# Altium PCB LP_LED_CUBE_8x8x8.PcbDoc (part 2 of 2)
Units mil, origin at the board's own origin, x right, y up, seen from the top; angles counter-clockwise.
Board outline 4240 x 2580 mil, 2 copper layers (Top Layer, Bottom Layer), stack 42.17 mil thick; 171 components, 249 nets, 833 pads, 0 vias.
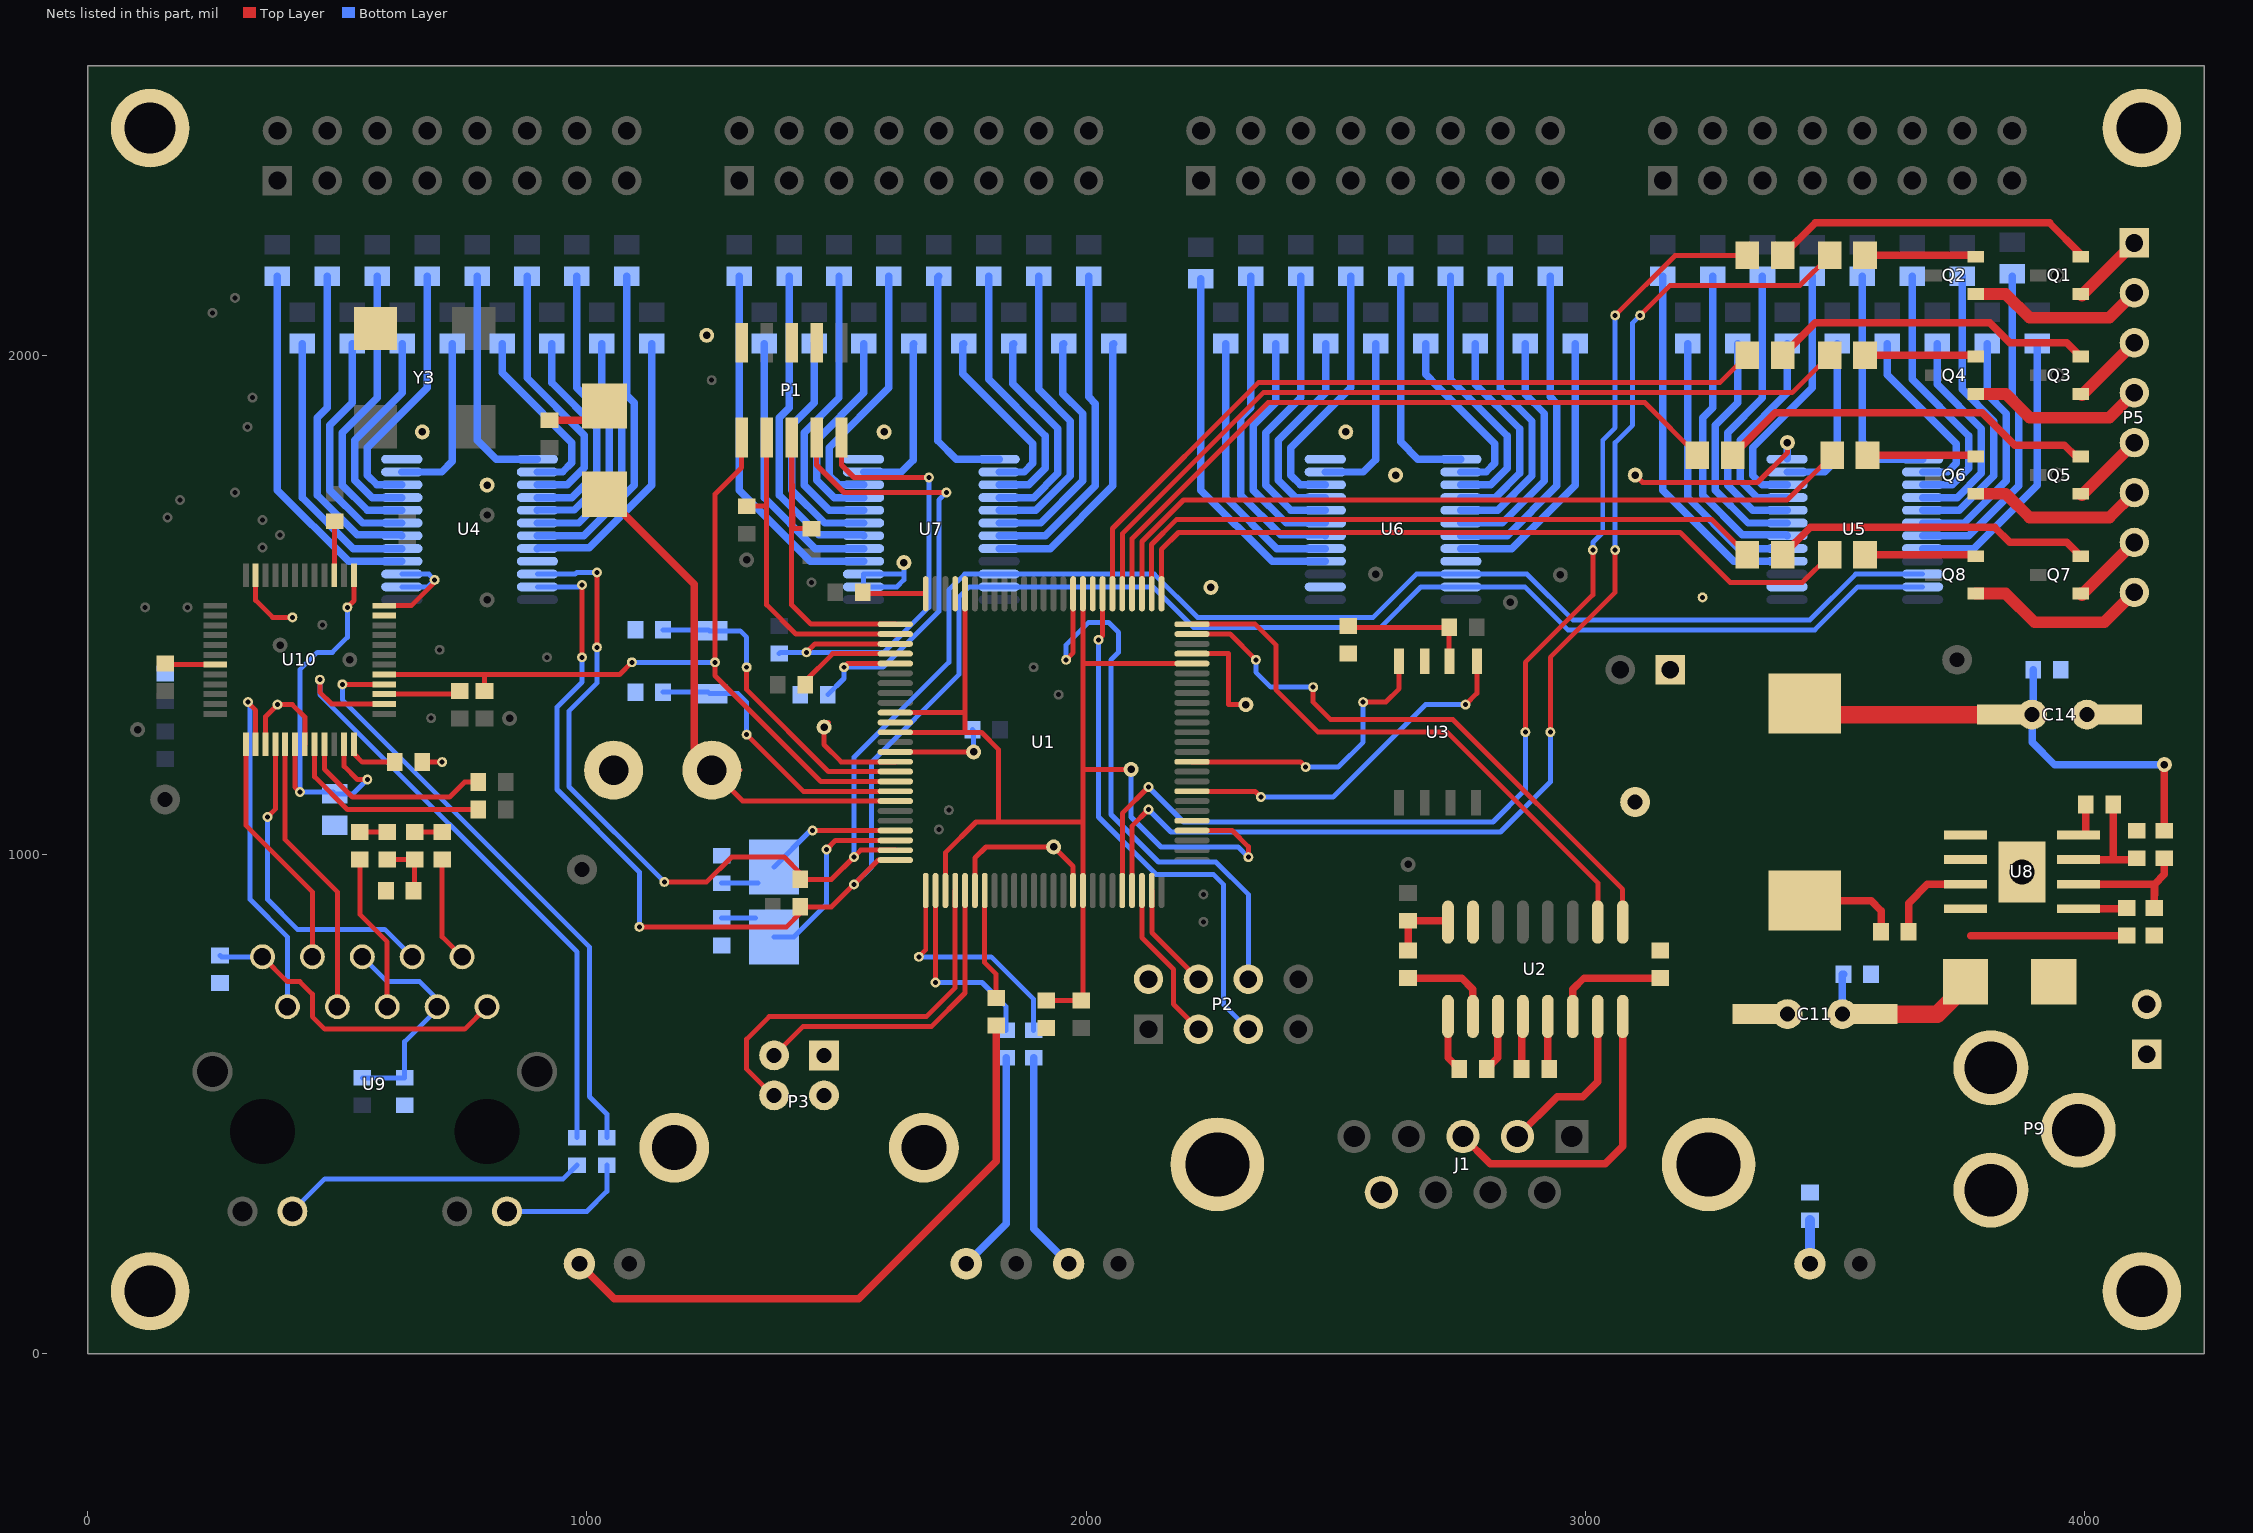
[diagram p2: the nets of this part, all layers, seen from the top]

## Nets (pads, with @x,y where several pads share a name; then routed paths per layer and width w, separated by ;. In a path a pad name is that pad's centre, name@x,y a point inside that pad or via, vN(x,y) a via of type N, cw(c..) or ccw(c..) an arc to the next point about the centre after c; other vN are vias at no path point) (continued)
F-SO: pad.42 pad.43 U1.61 U3.8 | length 581.2
  Top Layer w10: U1.61@2212.24,1185.63 2429.37,1185.63 pad.42@2440,1175 ; pad.43@2559.49,1305.51 2600.51,1305.51 2627.24,1332.24 U3.8@2627.24,1386.73
  Bottom Layer w10: pad.42@2440,1175 2505,1175 2555,1225 pad.43@2555,1305
F-W\P\: pad.44 pad.45 U1.58 U3.5 | length 725.3
  Top Layer w10: U1.58@2212.24,1126.57 2338.43,1126.57 pad.45@2350,1115 ; pad.44@2760,1300 2782.76,1322.76 U3.5@2782.76,1386.73
  Bottom Layer w10: pad.45@2350,1115 2495,1115 2680,1300 pad.44@2760,1300
GND: BT1.2 C4.1 C5.1 C6.1 C7.1 C8.1 C9.1 C10.1 C11.2 C12.2 C14.2 C15.2 C16.2 C18.2 C19.2 C20.2 C22.1 C23.2 J1.9 J1.10 J1.11 P1.3 P1.5 P1.9 P2.5 P3.4 P3.5 P9.2 P9.3 pad. pad.0 pad.1 pad.16 pad.27 pad.36 pad.49 pad.50 pad.51 pad.52 pad.53 pad.56 pad.65 pad.68 pad.70 pad.77 pad.95 pad.107 R7.2 R89.1 R91.1 R102.2 U1.11 U1.15 U1.31 U1.41 U1.55 U1.72 U1.83 U1.97 U2.15 U3.7 U4.2 U4.3 U4.12 U4.21 U5.2 U5.12 U6.2 U6.12 U6.21 U7.2 U7.3 U7.12 U8.5 U10.15 U10.19 U10.35 U10.36 U10.47 Y3.2 | length 2021.8
  Top Layer w10: U10.47@336.42,1559.29 336.42,1509.15 370.56,1475 pad.51@410,1475 ; U10.15@356.1,1220.71 356.1,1276.1 pad.68@380,1300 410,1300 434.84,1275.16 U10.19@434.84,1220.71 ; U10.36@594.29,1498.27 648.27,1498.27 695,1545 pad.107@695,1550 ; R102.2@670,1185 pad.70@710,1185 ; pad.49@1484.37,1264.37 pad.49@1475,1255 1475,1220 1509.37,1185.63 U1.15@1617.76,1185.63 ; U1.31@1777.2,927.76 1777.2,992.8 1799.41,1015 pad.56@1935,1015 1974.06,975.94 U1.41@1974.06,927.76 ; U1.72@2212.24,1402.17 2285,1402.17 2285,1300 pad.65@2320,1300 ; pad.77@3100,1760 3115,1745 3345,1745 3405,1805 pad.1@3405,1825
  Bottom Layer w10: U4.2@629.17,1536.02 681.02,1536.02 pad.107@695,1550 683.39,1561.61 U4.3@629.17,1561.61 ; pad.36@1635,1584.5 1635,1561.61 ; U5.12@3404.17,1791.73 U5.12@3405,1792.56 ; 1635,1561.61 U7.3@1554.17,1561.61 U7.2@1554.17,1536.02 1621.02,1536.02 1635,1550 1635,1561.61
  Bottom Layer w15: U5.12@3405,1792.56 pad.1@3405,1825
LED1: pad.55 R12.1 U1.27 | length 393.3
  Top Layer w10: pad.55@1698.46,743.46 U1.27@1698.46,927.76
  Bottom Layer w10: pad.55@1698.46,743.46 1791.54,743.46 1840,695 R12.1@1840,647.56
LED2: pad.54 R13.1 U1.26 | length 466.1
  Top Layer w10: pad.54@1665,795 1678.78,808.78 U1.26@1678.78,927.76
  Bottom Layer w10: pad.54@1665,795 1810,795 1895,710 R13.1@1895,647.56
LED_ACT: pad.48 R94.2 U10.26 | length 1294.8
  Top Layer w10: pad.48@465,1350 465,1325 488.58,1301.42 U10.26@594.29,1301.42
  Bottom Layer w10: pad.48@465,1350 465,1320 980,805 R94.2@980,432.56
LED_LINK: pad.46 R95.2 U10.28 | length 1212.1
  Top Layer w10: pad.46@510,1340.79 U10.28@594.29,1340.79
  Bottom Layer w10: pad.46@510,1340.79 510,1310 1005,815 1005,515 1040,480 R95.2@1040,432.56
"M232 +V": C2.1 U2.2 | length 193.8
  Top Layer w15: C2.1@2645,752.44 2752.56,752.44 2775,730 U2.2@2775,675.51
"M232 RX2": J1.3 U2.8 | length 617.8
  Top Layer w15: J1.3@2755,434.92 2809.92,380 3040,380 3075,415 U2.8@3075,675.51
"M232 TX2": J1.2 U2.7 | length 337.1
  Top Layer w15: J1.2@2864.06,434.92 2944.13,515 2995,515 3025,545 U2.7@3025,675.51
NetBT1_1: BT1.1 D4.2 U1.19 | length 1079.6
  Top Layer w10: BT1.1@1225.32,1194.69 BT1.1@1250.32,1194.69 ; BT1.1@1306.3,1168.7 BT1.1@1250.32,1168.7 1312.13,1106.89 U1.19@1617.76,1106.89
  Top Layer w15: D4.2@1035,1721.42 1215,1541.42 1215,1205 BT1.1@1225.32,1194.69
NetC1_1: C1.1 U2.3 | length 114.8
  Top Layer w15: C1.1@2802.56,570 2825,592.44 U2.3@2825,675.51
NetC1_2: C1.2 U2.1 | length 114.8
  Top Layer w15: U2.1@2725,675.51 2725,592.44 C1.2@2747.44,570
NetC2_2: C2.2 L1.1 U2.16 | length 141.1
  Top Layer w15: C2.2@2645,807.56 L1.1@2645,867.44 2722.05,867.44 U2.16@2725,864.49
NetC3_1: C3.1 U2.5 | length 106.6
  Top Layer w15: U2.5@2925,675.51 2925,572.56 C3.1@2927.56,570
NetC3_2: C3.2 U2.4 | length 106.6
  Top Layer w15: C3.2@2872.44,570 2872.44,672.95 U2.4@2875,675.51
NetC4_2: C4.2 U2.6 | length 238.8
  Top Layer w15: U2.6@2975,675.51 2975,730 2997.44,752.44 C4.2@3150,752.44
NetC5_2: C5.2 pad.20 U1.16 Y1.1 | length 644.4
  Top Layer w10: pad.20@1320,1375 1320,1330 1484.06,1165.94 U1.16@1617.76,1165.94
  Bottom Layer w10: C5.2@1152.56,1450 1243.78,1450 Y1.1@1245.79,1447.99 1307.01,1447.99 1320,1435 pad.20@1320,1375
NetC6_2: C6.2 pad.19 U1.18 Y1.2 | length 585.5
  Top Layer w10: pad.19@1320,1240 1433.43,1126.57 U1.18@1617.76,1126.57
  Bottom Layer w10: C6.2@1152.56,1325 1242.8,1325 Y1.2@1245.79,1322.01 1302.99,1322.01 1320,1305 pad.19@1320,1240
NetC7_2: C7.2 pad.17 U1.22 Y2.1 | length 345.4
  Top Layer w10: pad.17@1452.17,1047.83 U1.22@1617.76,1047.83
  Bottom Layer w10: C7.2@1270,942.44 Y2.1@1342.44,942.44 ; Y2.1@1375,975 1447.83,1047.83 pad.17@1452.17,1047.83
NetC8_2: C8.2 pad.18 U1.23 Y2.2 | length 454.6
  Top Layer w10: pad.18@1480,1010 1498.15,1028.15 U1.23@1617.76,1028.15
  Bottom Layer w10: C8.2@1270,872.56 Y2.2@1337.44,872.56 ; Y2.2@1375,835 1415,835 1480,900 pad.18@1480,1010
NetC9_2: C9.2 L2.1 pad.85 pad.86 U1.10 U1.12 U1.28 U1.42 U1.54 U1.71 U1.84 U1.96 | length 3091.5
  Top Layer w10: U1.12@1617.76,1244.69 1757.52,1244.69 ; U1.10@1617.76,1284.06 1756.57,1284.06 ; U1.28@1718.15,927.76 1718.15,1003.7 1779.45,1065 1825,1065 ; U1.96@1757.52,1522.24 1757.52,1244.69 ; C9.2@1920,707.56 L2.1@1990,707.56 1993.74,707.56 U1.42@1993.74,927.76 1993.74,1065 ; U1.84@1993.74,1522.24 1993.74,1383.74 U1.71@2212.24,1382.48 1993.74,1382.48 1993.74,1170 ; pad.86@2090,1170.49 1994.23,1170.49 1993.74,1170 ; U1.54@2212.24,1047.83 2292.61,1047.83 2325,1015.45 pad.85@2325,994.51 ; 1757.52,1244.69 1790.32,1244.69 1825,1210 1825,1065 ; 1825,1065 1993.74,1065 ; 1993.74,1065 1993.74,1170
  Bottom Layer w10: pad.86@2090,1170.49 2090,1075 2150,1015 2304.51,1015 pad.85@2325,994.51
NetC10_2: C10.2 L3.1 U3.6 | length 271.9
  Top Layer w10: C10.2@2525,1457.56 2527.56,1455 L3.1@2727.44,1455 2727.44,1386.93 U3.6@2727.64,1386.73
NetC13_1: C13.1 U8.7 | length 200.5
  Top Layer w15: C13.1@3647.56,845 3647.56,902.56 3685,940 3761.81,940 U8.7@3775,940
NetC13_2: C13.2 L4.1 U8.6 | length 203.3
  Top Layer w15: L4.1@3440,907.5 3572.5,907.5 3592.44,887.56 C13.2@3592.44,845
NetC16_1: C16.1 R90.2 U8.3 | length 235.9
  Top Layer w10: C16.1@4105,992.44 C16.1@4115,992.44
  Top Layer w15: U8.3@3988.19,989.61 4102.17,989.61 C16.1@4105,992.44 ; 4057.56,992.05 R90.2@4057.56,1100
NetC17_1: C17.1 U9.8 | length 211.6
  Top Layer w10: C17.1@710,990 710,835 U9.8@750,795
NetC17_2: C17.2 R92.1 | length 55
  Top Layer w10: R92.1@655,1045.12 C17.2@710,1045.12
NetC18_1: C18.1 L5.1 U9.4 U9.7 | length 454.6
  Bottom Layer w10: L5.1@550,552.56 C18.1@635,552.56 635,625 700,690 U9.7@700,695 700,710 665,745 600,745 U9.4@550,795
NetC19_1: C19.1 R92.2 R93.1 | length 118.5
  Top Layer w10: R93.1@600,990 R92.2@655,990 655,930 C19.1@652.56,927.56
NetC21_1: C21.1 U9.5 | length 317.8
  Top Layer w10: C21.1@545,990 545,880 600,825 U9.5@600,695
NetC21_2: C21.2 R93.2 | length 55
  Top Layer w10: C21.2@545,1045.12 R93.2@600,1045.12
NetC22_2: C22.2 U9.9 U9.10 | length 641.1
  Top Layer w10: U9.9@350,795 400,745 425,745 450,720 450,675 475,650 755,650 U9.10@800,695
  Bottom Layer w10: C22.2@265,797.56 267.56,795 U9.9@350,795
NetD1_2: D1.2 R11.2 | length 1250.3
  Top Layer w15: D1.2@985,180 1055,110 1545,110 1820,385 R11.2@1820,657.44
NetD2_2: D2.2 R12.2 | length 445.6
  Bottom Layer w15: D2.2@1760,180 1840,260 R12.2@1840,592.44
NetD3_2: D3.2 R13.2 | length 441.4
  Bottom Layer w15: R13.2@1895,592.44 1895,250 D3.2@1965,180
NetD4_1: D4.1 R14.1 | length 121.8
  Top Layer w10: D4.1@1006.42,1870 D4.1@1035,1898.58
  Top Layer w15: R14.1@925,1870 D4.1@1006.42,1870
NetD5_1: D5.1 W1.2
NetD6_2: D6.2 R91.2 | length 87.4
  Bottom Layer w20: D6.2@3450,180 R91.2@3450,267.44
NetP9_1: P9.1 W1.1
NetQ1_2: Q1.2 R15.1 | length 654.9
  Top Layer w10: Q1.2@3992.32,2197.4 Q1.2@3992.32,2202.68
  Top Layer w15: R15.1@3395.43,2200 3460.43,2265 3930,2265 Q1.2@3992.32,2202.68
NetQ2_2: Q2.2 R23.1 | length 223
  Top Layer w10: Q2.2@3779.72,2200 Q2.2@3782.32,2197.4
  Top Layer w15: R23.1@3560.43,2200 Q2.2@3779.72,2200
NetQ3_2: Q3.2 R33.1 | length 651.8
  Top Layer w15: R33.1@3395.43,2000 3460.43,2065 3810,2065 3850,2025 3964.72,2025 Q3.2@3992.32,1997.4
NetQ4_2: Q4.2 R34.1 | length 223
  Top Layer w10: Q4.2@3779.72,2000 Q4.2@3782.32,1997.4
  Top Layer w15: R34.1@3560.43,2000 Q4.2@3779.72,2000
NetQ5_2: Q5.2 R35.1 | length 768.4
  Top Layer w15: R35.1@3295.43,1800 3380.43,1885 3795,1885 3860,1820 3960,1820 3982.6,1797.4 Q5.2@3992.32,1797.4
NetQ6_2: Q6.2 R36.1 | length 218
  Top Layer w10: Q6.2@3779.72,1800 Q6.2@3782.32,1797.4
  Top Layer w15: R36.1@3565.43,1800 Q6.2@3779.72,1800
NetQ7_2: Q7.2 R37.1 | length 643.5
  Top Layer w15: R37.1@3395.43,1600 3450.43,1655 3820,1655 3850,1625 3964.72,1625 Q7.2@3992.32,1597.4
NetQ8_2: Q8.2 R41.1 | length 223
  Top Layer w10: Q8.2@3779.72,1600 Q8.2@3782.32,1597.4
  Top Layer w15: R41.1@3560.43,1600 Q8.2@3779.72,1600
NetR16_2: R16.2 U4.4 | length 736.8
  Bottom Layer w15: R16.2@380,2158.5 380,1730 522.8,1587.2 U4.4@629.17,1587.2
NetR17_2: R17.2 U4.5 | length 550
  Bottom Layer w15: R17.2@430,2023.5 430,1715 532.2,1612.8 U4.5@629.17,1612.8
NetR18_1: R18.1 U4.20 | length 565.4
  Bottom Layer w15: U4.20@900.83,1612.8 902.56,1614.53 1004.53,1614.53 1130,1740 R18.1@1130,2023.5
NetR19_2: R19.2 U4.6 | length 649.8
  Bottom Layer w15: R19.2@480,2158.5 480,1895 460,1875 460,1720 539.88,1640.12 627.44,1640.12 U4.6@629.17,1638.39
NetR20_1: R20.1 U4.19 | length 661
  Bottom Layer w15: U4.19@900.83,1638.39 993.39,1638.39 1095,1740 1095,1905 1080,1920 R20.1@1080,2158.5
NetR21_2: R21.2 U4.7 | length 483.7
  Bottom Layer w15: R21.2@530,2023.5 530,1905 485,1860 485,1730 551.02,1663.98 U4.7@629.17,1663.98
NetR22_1: R22.1 U4.18 | length 494.9
  Bottom Layer w15: U4.18@900.83,1663.98 983.98,1663.98 1070,1750 1070,1885 1030,1925 R22.1@1030,2023.5
NetR24_2: R24.2 U4.8 | length 587.6
  Bottom Layer w15: R24.2@580,2158.5 580,1915 510,1845 510,1740 560.43,1689.57 U4.8@629.17,1689.57
NetR25_1: R25.1 U4.17 | length 599
  Bottom Layer w15: U4.17@900.83,1689.57 900.83,1690 975,1690 1045,1760 1045,1870 980,1935 R25.1@980,2158.5
NetR26_2: R26.2 U4.9 | length 421.5
  Bottom Layer w15: U4.9@629.17,1714.96 570.04,1714.96 535,1750 535,1830 630,1925 R26.2@630,2023.5
NetR27_1: R27.1 U4.16 | length 435.7
  Bottom Layer w15: U4.16@900.83,1714.96 969.96,1714.96 1020,1765 1020,1855 930,1945 R27.1@930,2023.5
NetR28_2: R28.2 U4.10 | length 525.4
  Bottom Layer w15: U4.10@629.17,1740.55 579.45,1740.55 560,1760 560,1815 680,1935 R28.2@680,2158.5
NetR29_1: R29.1 U4.15 | length 539.6
  Bottom Layer w15: R29.1@880,2158.5 880,1955 995,1840 995,1775 960.55,1740.55 U4.15@900.83,1740.55
NetR30_2: R30.2 U4.11 | length 345.8
  Bottom Layer w15: U4.11@629.17,1766.14 708.86,1766.14 730,1787.28 R30.2@730,2023.5
NetR31_1: R31.1 U4.14 | length 373.5
  Bottom Layer w15: R31.1@830,2023.5 830,1965 855,1940 855,1939.64 970,1824.64 970,1785 951.14,1766.14 U4.14@900.83,1766.14
NetR32_1: R32.1 U4.13 | length 465.2
  Bottom Layer w15: R32.1@780,2158.5 780,1830 818.27,1791.73 U4.13@900.83,1791.73
NetR38_2: R38.2 U5.4 | length 736.8
  Bottom Layer w15: R38.2@3155,2158.5 3155,1730 3297.8,1587.2 U5.4@3404.17,1587.2
NetR39_2: R39.2 U5.5 | length 550
  Bottom Layer w15: R39.2@3205,2023.5 3205,1715 3307.2,1612.8 U5.5@3404.17,1612.8
NetR40_1: R40.1 U5.20 | length 565.4
  Bottom Layer w15: U5.20@3675.83,1612.8 3777.8,1612.8 3905,1740 R40.1@3905,2023.5
NetR42_2: R42.2 U5.6 | length 649.8
  Bottom Layer w15: R42.2@3255,2158.5 3255,1895 3235,1875 3235,1720 3314.88,1640.12 3402.44,1640.12 U5.6@3404.17,1638.39
NetR43_1: R43.1 U5.19 | length 659.5
  Bottom Layer w15: U5.19@3675.83,1638.39 3768.39,1638.39 3868.27,1738.27 3868.27,1903.27 3855,1916.54 R43.1@3855,2158.5
NetR44_2: R44.2 U5.7 | length 483.7
  Bottom Layer w15: R44.2@3305,2023.5 3305,1905 3260,1860 3260,1730 3326.02,1663.98 U5.7@3404.17,1663.98
NetR45_1: R45.1 U5.18 | length 493.4
  Bottom Layer w15: U5.18@3675.83,1663.98 3758.98,1663.98 3843.27,1748.27 3843.27,1883.27 3805,1921.54 R45.1@3805,2023.5
NetR46_2: R46.2 U6.4 | length 731.8
  Bottom Layer w15: R46.2@2230,2153.5 2230,1730 2372.8,1587.2 U6.4@2479.17,1587.2
NetR47_2: R47.2 U5.8 | length 587.6
  Bottom Layer w15: R47.2@3355,2158.5 3355,1915 3285,1845 3285,1740 3335.43,1689.57 U5.8@3404.17,1689.57
NetR48_1: R48.1 U5.17 | length 597.3
  Bottom Layer w15: U5.17@3675.83,1689.57 3749.57,1689.57 3818.27,1758.27 3818.27,1868.27 3755,1931.54 R48.1@3755,2158.5
NetR49_2: R49.2 U6.5 | length 550
  Bottom Layer w15: R49.2@2280,2023.5 2280,1715 2382.2,1612.8 U6.5@2479.17,1612.8
NetR50_1: R50.1 U6.20 | length 565.4
  Bottom Layer w15: U6.20@2750.83,1612.8 2852.8,1612.8 2980,1740 R50.1@2980,2023.5
NetR51_2: R51.2 U5.9 | length 421.5
  Bottom Layer w15: U5.9@3404.17,1714.96 3345.04,1714.96 3310,1750 3310,1830 3405,1925 R51.2@3405,2023.5
NetR52_1: R52.1 U5.16 | length 434.2
  Bottom Layer w15: U5.16@3675.83,1714.96 3744.96,1714.96 3793.27,1763.27 3793.27,1853.27 3705,1941.54 R52.1@3705,2023.5
NetR53_2: R53.2 U6.6 | length 649.8
  Bottom Layer w15: R53.2@2330,2158.5 2330,1895 2310,1875 2310,1720 2389.88,1640.12 2477.44,1640.12 U6.6@2479.17,1638.39
NetR54_1: R54.1 U6.19 | length 659.5
  Bottom Layer w15: U6.19@2750.83,1638.39 2843.39,1638.39 2943.27,1738.27 2943.27,1903.27 2930,1916.54 R54.1@2930,2158.5
NetR55_2: R55.2 U5.10 | length 525.4
  Bottom Layer w15: U5.10@3404.17,1740.55 3354.45,1740.55 3335,1760 3335,1815 3455,1935 R55.2@3455,2158.5
NetR56_1: R56.1 U5.15 | length 538.1
  Bottom Layer w15: R56.1@3655,2158.5 3655,1951.54 3768.27,1838.27 3768.27,1773.27 3735.55,1740.55 U5.15@3675.83,1740.55
NetR57_2: R57.2 U6.7 | length 483.7
  Bottom Layer w15: R57.2@2380,2023.5 2380,1905 2335,1860 2335,1730 2401.02,1663.98 U6.7@2479.17,1663.98
NetR58_1: R58.1 U6.18 | length 493.4
  Bottom Layer w15: U6.18@2750.83,1663.98 2833.98,1663.98 2918.27,1748.27 2918.27,1883.27 2880,1921.54 R58.1@2880,2023.5
NetR59_2: R59.2 U5.11 | length 343.5
  Bottom Layer w15: U5.11@3404.17,1766.14 3480,1766.14 3505,1791.14 R59.2@3505,2023.5
NetR60_1: R60.1 U5.14 | length 372.2
  Bottom Layer w15: R60.1@3605,2023.5 3605,1961.54 3604.82,1961.36 3743.27,1822.91 3743.27,1783.27 3726.14,1766.14 U5.14@3675.83,1766.14
NetR61_2: R61.2 U6.8 | length 587.6
  Bottom Layer w15: R61.2@2430,2158.5 2430,1915 2360,1845 2360,1740 2410.43,1689.57 U6.8@2479.17,1689.57
NetR62_1: R62.1 U6.17 | length 597.3
  Bottom Layer w15: U6.17@2750.83,1689.57 2824.57,1689.57 2893.27,1758.27 2893.27,1868.27 2830,1931.54 R62.1@2830,2158.5
NetR63_1: R63.1 U5.13 | length 467.2
  Bottom Layer w15: R63.1@3555,2158.5 3555,1826.54 3589.8,1791.73 U5.13@3675.83,1791.73
NetR64_2: R64.2 U7.4 | length 736.8
  Bottom Layer w15: R64.2@1305,2158.5 1305,1730 1447.8,1587.2 U7.4@1554.17,1587.2
NetR65_2: R65.2 U6.9 | length 421.5
  Bottom Layer w15: U6.9@2479.17,1714.96 2420.04,1714.96 2385,1750 2385,1830 2480,1925 R65.2@2480,2023.5
NetR66_1: R66.1 U6.16 | length 434.2
  Bottom Layer w15: U6.16@2750.83,1714.96 2819.96,1714.96 2868.27,1763.27 2868.27,1853.27 2780,1941.54 R66.1@2780,2023.5
NetR67_2: R67.2 U7.5 | length 550
  Bottom Layer w15: R67.2@1355,2023.5 1355,1715 1457.2,1612.8 U7.5@1554.17,1612.8
NetR68_1: R68.1 U7.20 | length 565.4
  Bottom Layer w15: U7.20@1825.83,1612.8 1927.8,1612.8 2053.27,1738.27 2053.27,2021.77 R68.1@2055,2023.5
NetR69_2: R69.2 U6.10 | length 525.4
  Bottom Layer w15: U6.10@2479.17,1740.55 2429.45,1740.55 2410,1760 2410,1815 2530,1935 R69.2@2530,2158.5
NetR70_1: R70.1 U6.15 | length 538.1
  Bottom Layer w15: R70.1@2730,2158.5 2730,1951.54 2843.27,1838.27 2843.27,1773.27 2810.55,1740.55 U6.15@2750.83,1740.55
NetR71_2: R71.2 U7.6 | length 649.8
  Bottom Layer w15: R71.2@1405,2158.5 1405,1895 1385,1875 1385,1720 1464.88,1640.12 1552.44,1640.12 U7.6@1554.17,1638.39
NetR72_1: R72.1 U7.19 | length 659.5
  Bottom Layer w15: U7.19@1825.83,1638.39 1918.39,1638.39 2018.27,1738.27 2018.27,1903.27 2005,1916.54 R72.1@2005,2158.5
NetR73_2: R73.2 U6.11 | length 343.5
  Bottom Layer w15: U6.11@2479.17,1766.14 2555,1766.14 2580,1791.14 R73.2@2580,2023.5
NetR74_1: R74.1 U6.14 | length 372
  Bottom Layer w15: R74.1@2680,2023.5 2680,1961.54 2703.27,1938.27 2703.27,1937.91 2818.27,1822.91 2818.27,1783.27 2801.14,1766.14 U6.14@2750.83,1766.14
NetR75_2: R75.2 U7.7 | length 483.7
  Bottom Layer w15: R75.2@1455,2023.5 1455,1905 1410,1860 1410,1730 1476.02,1663.98 U7.7@1554.17,1663.98
NetR76_1: R76.1 U7.18 | length 494.9
  Bottom Layer w15: U7.18@1825.83,1663.98 1908.98,1663.98 1993.27,1748.27 1993.27,1883.27 1953.27,1923.27 1953.27,2021.77 R76.1@1955,2023.5
NetR77_1: R77.1 U6.13 | length 467.2
  Bottom Layer w15: R77.1@2630,2158.5 2630,1826.54 2664.8,1791.73 U6.13@2750.83,1791.73
NetR78_2: R78.2 U7.8 | length 587.6
  Bottom Layer w15: R78.2@1505,2158.5 1505,1915 1435,1845 1435,1740 1485.43,1689.57 U7.8@1554.17,1689.57
NetR79_1: R79.1 U7.17 | length 597.3
  Bottom Layer w15: U7.17@1825.83,1689.57 1899.57,1689.57 1968.27,1758.27 1968.27,1868.27 1905,1931.54 R79.1@1905,2158.5
NetR80_2: R80.2 U7.9 | length 421.5
  Bottom Layer w15: U7.9@1554.17,1714.96 1495.04,1714.96 1460,1750 1460,1830 1555,1925 R80.2@1555,2023.5
NetR81_1: R81.1 U7.16 | length 435.7
  Bottom Layer w15: U7.16@1825.83,1714.96 1894.96,1714.96 1943.27,1763.27 1943.27,1853.27 1853.27,1943.27 1853.27,2021.77 R81.1@1855,2023.5
NetR82_2: R82.2 U7.10 | length 525.4
  Bottom Layer w15: U7.10@1554.17,1740.55 1504.45,1740.55 1485,1760 1485,1815 1605,1935 R82.2@1605,2158.5
NetR83_1: R83.1 U7.15 | length 538.1
  Bottom Layer w15: R83.1@1805,2158.5 1805,1951.54 1918.27,1838.27 1918.27,1773.27 1885.55,1740.55 U7.15@1825.83,1740.55
NetR84_2: R84.2 U7.11 | length 343.5
  Bottom Layer w15: U7.11@1554.17,1766.14 1630,1766.14 1653.27,1789.41 1653.27,2021.77 R84.2@1655,2023.5
NetR85_1: R85.1 U7.14 | length 373.5
  Bottom Layer w15: R85.1@1755,2023.5 1753.27,2021.77 1753.27,1963.27 1778.27,1938.27 1778.27,1937.91 1893.27,1822.91 1893.27,1783.27 1876.14,1766.14 U7.14@1825.83,1766.14
NetR86_1: R86.1 U7.13 | length 468.6
  Bottom Layer w15: R86.1@1705,2158.5 1703.27,2156.77 1703.27,1828.27 1739.8,1791.73 U7.13@1825.83,1791.73
NetR87_1: R87.1 U8.1 | length 97.4
  Top Layer w15: U8.1@3988.19,891.18 4083.62,891.18 R87.1@4085,892.56
NetR88_1: R88.1 R89.2 U8.2 | length 307.7
  Top Layer w15: U8.2@3988.19,940.39 4140,940.39 R89.2@4140,892.56 4140.39,940.39 4160,960 R88.1@4160,992.44
NetR90_1: R90.1 U8.4 | length 60
  Top Layer w15: U8.4@4002.44,1040 R90.1@4002.44,1100
NetR94_1: R94.1 U9.12 | length 608.3
  Bottom Layer w10: U9.12@410,285 475,350 952.56,350 R94.1@980,377.44
NetR95_1: R95.1 U9.14 | length 269
  Bottom Layer w10: U9.14@840,285 1000,285 1040,325 R95.1@1040,377.44
NetR96_1: R96.1 U10.7 | length 101.7
  Top Layer w10: R96.1@155,1382.56 157.4,1380.16 U10.7@255.71,1380.16
NetR97_2: R97.2 U10.39 | length 108.6
  Top Layer w10: U10.39@493.9,1559.29 493.9,1666.34 R97.2@495,1667.44
NetR98_2: R98.2 U10.21 | length 393.7
  Top Layer w10: U10.21@474.21,1220.71 474.21,1170.79 530,1115 725,1115 755,1145 R98.2@782.44,1145
NetR99_1: R99.1 U10.20 | length 420.3
  Top Layer w10: U10.20@454.53,1220.71 454.53,1155.47 520,1090 R99.1@782.44,1090
NetR101_2: R101.2 U10.27 | length 182.8
  Top Layer w10: U10.27@594.29,1321.1 R101.2@745,1321.1 ; R101.2@745,1327.56 R101.2@735.64,1327.56 ; R101.2@735.64,1327.56 R101.2@741.98,1323.18 ; R101.2@735.64,1327.56 R101.2@741.98,1323.18 ; R101.2@741.98,1323.18 R101.2@745,1321.1 ; R101.2@741.98,1323.18 R101.2@745,1321.1
NetR102_1: R102.1 U10.24 | length 107.5
  Top Layer w10: U10.24@533.27,1220.71 533.27,1201.73 550,1185 R102.1@614.88,1185
PFB: C23.1 pad.41 pad.69 pad.71 U10.18 U10.23 U10.37 | length 846.4
  Top Layer w10: U10.18@415.16,1220.71 415.16,1134.84 pad.41@425,1125 ; U10.23@513.58,1220.71 513.58,1176.42 540,1150 pad.69@560,1150 ; pad.71@520,1495 533.27,1508.27 U10.37@533.27,1559.29
  Bottom Layer w10: pad.71@520,1495 520,1435 490,1405 460,1405 425,1370 pad.41@425,1125 491.5,1125 C23.1@495,1121.5 531.5,1121.5 pad.69@560,1150
R\E\S\E\T\: P1.10 pad.21 pad.75 R1.1 U1.17 U10.29 | length 1653.2
  Top Layer w10: U10.29@594.29,1360.47 795,1360.47 ; R1.1@795,1327.56 795,1360.47 ; pad.75@1090,1385 1065.47,1360.47 795,1360.47 ; P1.10@1310,1835 1310,1775 1256.75,1721.75 pad.21@1256.75,1385 1256.75,1358.25 1468.74,1146.26 U1.17@1617.76,1146.26
  Bottom Layer w10: pad.75@1090,1385 pad.21@1256.75,1385
R\S\T\O\U\T\: pad.37 R2.1 U1.14 | length 202.5
  Top Layer w10: U1.14@1617.76,1205.32 pad.37@1774.69,1205.32
  Bottom Layer w10: R2.1@1772.44,1250 1774.69,1247.76 pad.37@1774.69,1205.32
RO_1: P5.1 Q1.3 | length 152.3
  Top Layer w23.62: Q1.3@3992.32,2122.6 3994.96,2119.96 P5.1@4100,2225
RO_2: P5.2 Q2.3 | length 358.1
  Top Layer w23.62: Q2.3@3782.32,2122.6 3842.32,2122.6 3889.92,2075 4050,2075 P5.2@4100,2125
RO_3: P5.3 Q3.3 | length 152.3
  Top Layer w23.62: Q3.3@3992.32,1922.6 3994.96,1919.96 P5.3@4100,2025
RO_4: P5.4 Q4.3 | length 358.1
  Top Layer w23.62: Q4.3@3782.32,1922.6 3842.32,1922.6 3889.92,1875 4050,1875 P5.4@4100,1925
RO_5: P5.5 Q5.3 | length 152.3
  Top Layer w23.62: Q5.3@3992.32,1722.6 3994.96,1719.96 P5.5@4100,1825
RO_6: P5.6 Q6.3 | length 358.1
  Top Layer w23.62: Q6.3@3782.32,1722.6 3842.32,1722.6 3889.92,1675 4050,1675 P5.6@4100,1725
RO_7: P5.7 Q7.3 | length 152.3
  Top Layer w23.62: Q7.3@3992.32,1522.6 3994.96,1519.96 P5.7@4100,1625
RO_8: P5.8 Q8.3 | length 366.4
  Top Layer w23.62: Q8.3@3782.32,1522.6 3842.32,1522.6 3899.92,1465 4040,1465 P5.8@4100,1525
ROW1: pad.83 pad.90 pad.92 pad.93 R15.2 U1.46 | length 2378.7
  Top Layer w10: U1.46@2072.48,927.76 2072.48,1082.48 pad.83@2125,1135 ; pad.93@2880,1245 2880,1385 3015,1520 pad.92@3015,1610 ; pad.90@3060,2080 3180,2200 R15.2@3324.57,2200
  Bottom Layer w10: pad.83@2125,1135 2195,1065 2815,1065 2880,1130 pad.93@2880,1245 ; pad.92@3015,1610 3015,1625 3035,1645 3035,1830 3060,1855 pad.90@3060,2080
ROW2: pad.84 pad.89 pad.91 pad.94 R23.2 U1.47 | length 2480
  Top Layer w10: U1.47@2092.17,927.76 2092.17,1057.17 pad.84@2125,1090 ; pad.94@2930,1245 2930,1395 3060,1525 pad.91@3060,1610 ; pad.89@3110,2080 3170,2140 3430,2140 3489.57,2199.57 R23.2@3489.57,2200
  Bottom Layer w10: pad.84@2125,1090 2170,1045 2830,1045 2930,1145 pad.94@2930,1245 ; pad.91@3060,1610 3060,1825 3095,1860 3095,2065 pad.89@3110,2080
ROW3: R33.2 U1.81 | length 1546.1
  Top Layer w10: U1.81@2052.8,1522.24 2052.8,1652.8 2345,1945 3269.57,1945 R33.2@3324.57,2000
ROW4: R34.2 U1.80 | length 1685.4
  Top Layer w10: U1.80@2072.48,1522.24 2072.48,1642.52 2354.96,1925 3414.57,1925 R34.2@3489.57,2000
ROW5: R35.2 U1.79 | length 1399.2
  Top Layer w10: U1.79@2092.17,1522.24 2092.17,1632.83 2364.33,1905 3119.57,1905 R35.2@3224.57,1800
ROW6: R36.2 U1.78 | length 1559
  Top Layer w10: U1.78@2111.85,1522.24 2111.85,1626.85 2195,1710 3404.57,1710 R36.2@3494.57,1800
ROW7: R37.2 U1.77 | length 1342.2
  Top Layer w10: U1.77@2130.86,1522.24 2130.86,1620.86 2180.67,1670.67 3253.9,1670.67 R37.2@3324.57,1600
ROW8: R41.2 U1.76 | length 1505.8
  Top Layer w10: U1.76@2151.22,1522.24 2151.22,1611.22 2185,1645 3190,1645 3290,1545 3435,1545 3489.57,1599.57 R41.2@3489.57,1600
RTCK: R10.1 U1.100 | length 127.3
  Top Layer w10: R10.1@1552.56,1525 1555,1522.56 1677.24,1522.56 U1.100@1678.78,1522.24
RXD+: pad.8 U9.1 U10.14 | length 734.2
  Top Layer w10: pad.8@321.12,1305.2 320.46,1304.54 336.42,1288.58 U10.14@336.42,1220.71
  Bottom Layer w10: pad.8@321.12,1305.2 325,1301.32 325,910 400,835 U9.1@400,695
RXD-: U9.2 U10.13 | length 480.9
  Top Layer w10: U10.13@316.73,1220.71 316.73,1058.27 450,925 U9.2@450,795
SCL-0: pad.32 pad.114 pad.117 pad.118 R4.2 U1.24 U4.22 U5.22 U6.22 U7.22 | length 4094.9
  Top Layer w10: pad.117@1020,1415 pad.114@1020,1565 ; pad.118@1155,945 1240,945 1290,995 1395,995 1427.56,962.44 R4.2@1427.56,950 1490,950 pad.32@1535,995 1548.46,1008.46 U1.24@1617.76,1008.46
  Bottom Layer w10: U4.22@900.83,1561.61 976.26,1561.61 979.64,1565 pad.114@1020,1565 ; pad.117@1020,1415 1020,1343.13 963.75,1286.88 963.75,1136.25 pad.118@1150,950 ; pad.32@1535,995 1535,1195 1725,1385 1725,1530 1756.61,1561.61 U7.22@1825.83,1561.61 2136.67,1561.61 2223.28,1475 2575,1475 2661.61,1561.61 U6.22@2750.83,1561.61 2883.39,1561.61 2975,1470 3450,1470 3541.61,1561.61 U5.22@3675.83,1561.61
SCL-2: P2.6 U1.49 | length 216.5
  Top Layer w10: U1.49@2131.54,927.76 2131.54,843.46 P2.6@2225,750
SDA-0: pad.30 pad.113 pad.116 pad.119 R3.2 U1.25 U4.23 U5.23 U6.23 U7.23 | length 4180.2
  Top Layer w10: pad.116@990,1395 pad.113@990,1540 ; pad.119@1105,855 1400,855 1427.56,882.56 R3.2@1427.56,895 1490,895 pad.30@1535,940 1583.78,988.78 U1.25@1617.76,988.78
  Bottom Layer w10: U4.23@900.83,1536.02 986.02,1536.02 pad.113@990,1540 ; pad.116@990,1395 990,1345 940,1295 940,1130 1105,965 pad.119@1105,855 ; pad.30@1535,940 1570,975 1570,1185 1745,1360 1745,1515 1766.02,1536.02 U7.23@1825.83,1536.02 2133.98,1536.02 2215,1455 2590,1455 2671.02,1536.02 U6.23@2750.83,1536.02 2878.98,1536.02 2965,1450 3460,1450 3546.02,1536.02 U5.23@3675.83,1536.02
SDA-2: P2.2 U1.48 | length 324.6
  Top Layer w10: U1.48@2111.85,927.76 2111.85,833.15 2175,770 2175,700 P2.2@2225,650
TCK: P1.4 pad.24 pad.25 R7.1 U1.5 | length 992.8
  Top Layer w10: P1.4@1460,1835 1460,1780 1515,1725 pad.25@1720,1725 ; pad.24@1515,1375 1522.48,1382.48 U1.5@1617.76,1382.48
  Bottom Layer w10: R7.1@1482.56,1320 1515,1352.44 pad.24@1515,1375 1593.28,1375 1705,1486.72 1705,1710 pad.25@1720,1725
TDI: P1.8 R5.1 U1.2 | length 656.6
  Top Layer w10: R5.1@1320,1697.56 1357.44,1697.56 ; P1.8@1360,1835 1360,1500 1418.46,1441.54 U1.2@1617.76,1441.54 U1.2@1616.22,1440
TDO/SW0: P1.6 R6.1 U1.1 | length 778.8
  Top Layer w10: R6.1@1450,1652.56 1412.44,1652.56 P1.6@1410,1835 1410,1500 1448.78,1461.22 U1.1@1617.76,1461.22
TMS: P1.2 pad.22 pad.23 R8.1 U1.3 | length 1023.4
  Top Layer w10: pad.22@1440,1405 1456.85,1421.85 U1.3@1617.76,1421.85 ; P1.2@1510,1835 1510,1780 1535,1755 pad.23@1685,1755
  Bottom Layer w10: R8.1@1385,1402.44 1387.56,1405 pad.22@1440,1405 1595,1405 1685,1495 pad.23@1685,1755
TRST: R9.1 U1.4 | length 210.4
  Top Layer w10: R9.1@1437.56,1340 1437.56,1347.56 1492.17,1402.17 U1.4@1617.76,1402.17
TXD+: U9.3 U10.17 | length 569
  Top Layer w10: U10.17@395.47,1220.71 395.47,1029.53 500,925 U9.3@500,695
TXD-: pad.12 U9.6 U10.16 | length 654.9
  Top Layer w10: pad.12@360,1075 375.79,1090.79 U10.16@375.79,1220.71
  Bottom Layer w10: pad.12@360,1075 360,910 420,850 595,850 U9.6@650,795
U1_RXD: pad.57 pad.58 U1.74 U2.9 | length 1172.4
  Top Layer w10: U1.74@2212.24,1441.54 2288.46,1441.54 pad.58@2340,1390 ; pad.57@2455,1335 2455,1305 2490,1270 2735,1270 3075,930 U2.9@3075,864.49
  Bottom Layer w10: pad.58@2340,1390 2340,1365 2370,1335 pad.57@2455,1335
U1_TXD: U1.75 U2.10 | length 1158.8
  Top Layer w10: U1.75@2212.24,1461.22 2338.78,1461.22 2380,1420 2380,1330 2465,1245 2723.28,1245 3025,943.28 U2.10@3025,864.49
U3_RXD: P2.7 pad.62 U1.85 | length 1182.5
  Top Layer w10: pad.62@1960,1390 1974.06,1404.06 U1.85@1974.06,1522.24
  Bottom Layer w10: pad.62@1960,1390 1960,1420 2005,1465 2045,1465 2065,1445 2065,1405 2050,1390 2050,1080 2145,985 2260,985 2325,920 P2.7@2325,750
U3_TXD: P2.3 pad.61 U1.82 | length 1067.2
  Top Layer w10: pad.61@2025,1430 2033.11,1438.11 U1.82@2033.11,1522.24
  Bottom Layer w10: pad.61@2025,1430 2025,1075 2140,960 2255,960 2275,940 2275,700 P2.3@2325,650
"USB 5V": P3.1
"USB D+": P3.3 U1.29 | length 792.1
  Top Layer w10: P3.3@1375,517.5 1372.5,517.5 1320,570 1320,630 1365,675 1680,675 1737.83,732.83 U1.29@1737.83,927.76
"USB D-": P3.2 U1.30 | length 639.5
  Top Layer w10: P3.2@1375,597.5 1432.5,655 1690,655 1757.52,722.52 U1.30@1757.52,927.76
"USB LED": R11.1 U1.32 | length 224.8
  Top Layer w10: U1.32@1796.89,927.76 1796.89,783.11 1820,760 R11.1@1820,712.56
VCC: C11.1 C12.1 D5.2 R87.2 U8.8 | length 677
  Top Layer w10: C11.1@3515,680 C11.1@3575,680 ; D5.2@3761.42,736.42 D5.2@3761.42,745
  Top Layer w15: 3772.44,837.44 R87.2@4085,837.44
  Top Layer w35: C11.1@3575,680 3705,680 D5.2@3761.42,736.42
  Bottom Layer w10: C11.1@3512.44,682.56 C11.1@3515,680
  Bottom Layer w15: C11.1@3515,680 3515,760 C12.1@3517.44,760
VOUT: C14.1 C15.1 L4.2 pad.2 R88.2 W2.1 | length 979.9
  Top Layer w10: C14.1@3835,1280 C14.1@3870,1280
  Top Layer w15: R88.2@4160,1047.56 pad.2@4160,1180
  Top Layer w35: L4.2@3462.5,1280 C14.1@3835,1280
  Bottom Layer w15: C14.1@3870,1280 3895,1255 3895,1225 3940,1180 pad.2@4160,1180 ; C14.1@3895,1280 3897.44,1282.44 C15.1@3897.44,1370
pads on no net: J1.1 J1.4 J1.5 J1.6 J1.7 J1.8 P1.7 R2.2 U1.6 U1.7 U1.8 U1.9 U1.13 U1.33 U1.34 U1.35 U1.36 U1.37 U1.38 U1.39 U1.40 U1.43 U1.44 U1.45 U1.50 U1.51 U1.52 U1.53 U1.56 U1.57 U1.64 U1.65 U1.66 U1.67 U1.68 U1.69 U1.70 U1.73 U1.98 U1.99 U2.11 U2.12 U2.13 U2.14 U4.1 U5.1 U6.1 U7.1 U9. U9.GND U10.1 U10.5 U10.6 U10.8 U10.9 U10.10 U10.11 U10.12 U10.25 U10.33 U10.38 U10.42 U10.45 U10.46 Y3.1

## Polygon pours and split planes (outlines as drawn)
GND on Bottom Layer "Top Layer-No Net" (solid, remove dead copper, pour order 41): 0,2580 0,0 4240,0 4240,2580
GND on Top Layer "Top Layer-No Net" (solid, remove dead copper, pour order 43): 4240,2580 4240,0 0,0 0,2580

## Other copper
Top Layer:
  rectangle net NetC13_2: 3500,925 3625,980
  rectangle net NetP9_1: 3825,550 4160,635
  rectangle net NetD5_1: 3895,665 4160,790
  region net NetC13_2: 3805,970 3805,1010 3370,1010 3370,970
  rectangle net NetC13_2: 3370,850 3510,1010
  rectangle net VCC: 3725,770 3800,900
  rectangle net VOUT: 3135,1245 3510,1405
Bottom Layer:
  rectangle net GND: 3830,920 3920,1010
  rectangle net NetP9_1: 3825,550 4160,635

## Silkscreen, mask and mechanical layers (free items; w line width, h text height)
Top Overlay:
  text "1 - 16 COLUMN" at 540,2520 h60
  text "17 - 32 COLUMN" at 1450,2520 h60
  text "33 - 48 COLUMN" at 2375,2520 h60
  text "49 - 64 COLUMN" at 3300,2520 h60
  text "LPPROJECTS" at 55,2310 h100 r270
  text "Luka Penger" at 140,2310 h60 r270
  text "JTAG" at 1505,2130 h60
  text "1 - 8 ROW" at 4175,2000 h60 r270
  text "LPC176X" at 2020,1625 h60
  text "LED CUBE 8x8x8" at 75,1000 h100 r270
  text "12V" at 4175,270 h100 r90
  text "ETHERNET" at 390,35 h80
  text "USB" at 1355,35 h80
  text "RS-232" at 2630,35 h80
  text "DC" at 3765,35 h80

## Text inside footprints (layer, text, board x,y; h text height)
BT1: Top Overlay "+" at 1240.47,1099.8 h50 r180
C11: Top Overlay "+" at 3510,765 h50 r270
C14: Top Overlay "+" at 3900,1195 h50 r90
J1: Top Overlay "6" at 2930,275 h50 r180; Top Overlay "9" at 2605,275 h50 r180; Top Overlay "5" at 2545,540 h50 r180; Top Overlay "1" at 2980,540 h50 r180
P2: Top Overlay "8" at 2485,730 h50; Top Overlay "4" at 2485,630 h50; Top Overlay "1" at 2045,630 h50; Top Overlay "5" at 2025,730 h50
P3: Top Overlay "1" at 1539.17,577.83 h39.37
P4: Top Overlay "2" at 280,2430 h50; Top Overlay "1" at 280,2330 h50; Top Overlay "15" at 1140,2330 h50; Top Overlay "16" at 1140,2430 h50
P6: Top Overlay "2" at 3055,2430 h50; Top Overlay "1" at 3055,2330 h50; Top Overlay "15" at 3915,2330 h50; Top Overlay "16" at 3915,2430 h50
P7: Top Overlay "2" at 2130,2430 h50; Top Overlay "1" at 2130,2330 h50; Top Overlay "15" at 2990,2330 h50; Top Overlay "16" at 2990,2430 h50
P8: Top Overlay "2" at 1205,2430 h50; Top Overlay "1" at 1205,2330 h50; Top Overlay "15" at 2065,2330 h50; Top Overlay "16" at 2065,2430 h50